# Altium PCB PCB.PcbDoc (part 2 of 2)
Units mm, origin at the board's own origin, x right, y up, seen from the top; angles counter-clockwise.
Board outline 144.27 x 96.27 mm, 4 copper layers (Top Layer, Layer 1, Layer 2, Bottom Layer), stack 0.603 mm thick; 103 components, 109 nets, 723 pads, 259 vias.
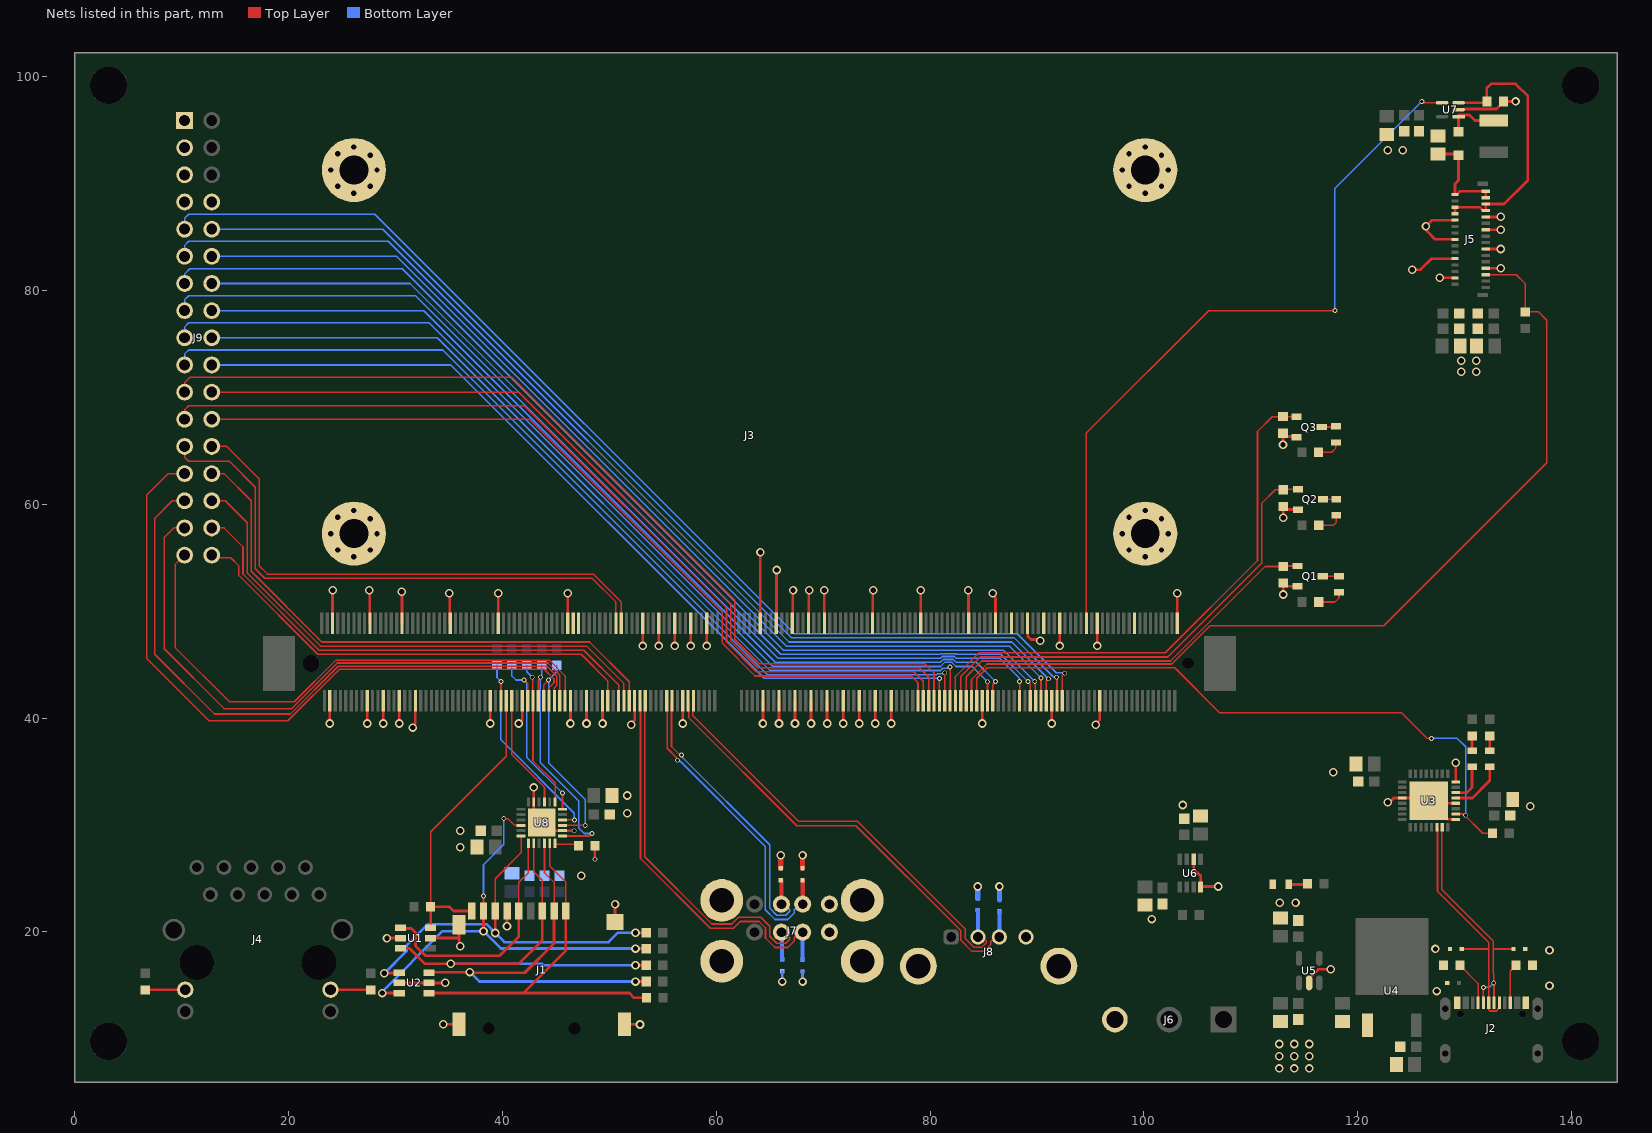
[diagram p4: the nets of this part, all layers, seen from the top]

## Via types
v1: diameter 0.8, hole 0.5, Top Layer to Bottom Layer, tented both sides, 169 vias
v2: diameter 0.45, hole 0.3, Top Layer to Bottom Layer, tented both sides, 58 vias
v3: diameter 0.8, hole 0.5, Top Layer to Bottom Layer, 32 vias

## Nets (pads, with @x,y where several pads share a name; then routed paths per layer and width w, separated by ;. In a path a pad name is that pad's centre, name@x,y a point inside that pad or via, vN(x,y) a via of type N, cw(c..) or ccw(c..) an arc to the next point about the centre after c; other vN are vias at no path point) (continued)
GND: C1.1 C2.1 C3.1 C4.1 C5.1 C6.1 C7.1 C8.1 C9.1 C10.1 C11.1 C12.1 C13.1 C14.1 C15.1 C16.1 C17.1 C18.1 C19.1 C20.1 C21.1 C22.1 C23.1 C24.1 C25.1 C26.1 C27.1 C28.1 C29.1 C30.1 C31.1 C32.1 C33.1 D1.2 D2.2 D3.2 D5.2 D6.2 D7.2 D8.2 D9.2 D10.2 J1.6 J1.10 J2.A1-B12 J2.A12-B1 J3.315 J3.P2 J3.P9 J3.P12 J3.P15 J3.P18 J3.P32 J3.P38 J3.P47 J3.P50 J3.P53 J3.P59 J3.P68 J3.P79 J3.P82 J3.P85 J3.P88 J3.P91 J3.P94 J3.P97 J3.P100 J3.P103 J3.P120 J3.P133 J3.P142 J3.S3 J3.S10 J3.S16 J3.S25 J3.S34 J3.S47 J3.S61 J3.S64 J3.S67 J3.S70 J3.S73 J3.S80 J3.S83 J3.S86 J3.S89 J3.S92 J3.S101 J3.S110 J3.S119 J3.S124 J3.S130 J3.S136 J3.S143 J3.S158 J5.9 J5.10 J5.13 J5.16 J5.19 J5.22 J5.25 J5.28 J6.3 J7.4A J7.4B J7.5 J8.4 J8.Shell J9.1 J9.3 J9.5 J9.7 J9.8 LED3.2 Q1.2 Q2.2 Q3.2 R7.1 R8.1 R10.1 R16.1 R25.1 R26.1 R27.1 U1.2 U1.5 U2.2 U2.5 U3.4 U3.17 U3.20 U3.24 U3.33 U4.1 U5.2 U6.2 U6.8 U7.2 U8.2 U8.11 U8.25 | length 203.6
  Top Layer w0.254: v1(23.869,39.497) J3.P2@23.869,41.619 ; J3.S3@24.119,48.869 24.125,48.875 24.125,51.938 v1(24.13,51.943) ; v1(27.369,39.497) J3.P9@27.369,41.619 ; v1(27.559,51.943) 27.594,51.908 27.594,48.895 J3.S10@27.619,48.869 ; v1(28.869,39.497) J3.P12@28.869,41.619 ; v1(29.21,19.431) U1.5@30.477,19.431 ; U2.2@30.35,15.24 U2.5@33.15,15.24 v1(34.671,15.24) ; v1(30.369,39.497) J3.P15@30.369,41.619 ; v1(30.607,51.816) 30.613,51.81 30.613,48.875 J3.S16@30.619,48.869 ; v1(31.623,39.116) 31.623,39.264 31.869,39.51 J3.P18@31.869,41.619 ; U1.2@33.277,19.431 35.811,19.431 35.938,19.304 ; v1(34.476,11.371) J1.10@35.938,11.371 ; v1(35.052,51.689) 35.094,51.647 35.094,48.895 J3.S25@35.119,48.869 ; J1.10@35.938,20.671 35.938,19.304 ; v1(36.068,18.669) 35.964,18.773 35.964,19.278 35.938,19.304 ; v1(38.869,39.497) J3.P32@38.869,41.619 ; J3.S34@39.619,48.869 39.622,48.872 39.622,51.687 v1(39.624,51.689) ; v1(40.438,20.522) J1.6@40.438,21.971 ; v1(41.529,39.497) 41.869,39.837 J3.P38@41.869,41.619 ; v1(42.938,33.516) U8.11@42.938,32.161 42.938,30.976 U8.25@43.688,30.226 44.438,29.476 U8.2@45.623,29.476 v2(46.724,29.476) ; v1(46.101,51.689) 46.11,51.68 46.11,48.878 J3.S47@46.119,48.869 ; v1(46.369,39.497) J3.P47@46.369,41.619 ; v1(47.869,39.497) J3.P50@47.869,41.619 ; v2(48.654,26.81) R10.1@48.654,28.067 ; v1(49.369,39.497) J3.P53@49.369,41.619 ; J1.10@50.538,20.921 v1(50.538,22.598) ; J1.10@51.438,11.371 v1@52.891,11.371 ; v1(52.07,39.37) 52.07,39.518 52.369,39.817 J3.P59@52.369,41.619 ; v1(53.119,46.747) J3.S61@53.119,48.869 ; v1(54.619,46.747) J3.S64@54.619,48.869 ; v1(56.119,46.747) J3.S67@56.119,48.869 ; v1(56.869,39.497) J3.P68@56.869,41.619 ; v1(57.619,46.747) J3.S70@57.619,48.869 ; v1(59.119,46.747) J3.S73@59.119,48.869 ; J3.S80@64.119,48.869 64.127,48.877 64.127,55.491 v1(64.135,55.499) ; v1(64.369,39.497) J3.P79@64.369,41.619 ; J3.S83@65.619,48.869 65.639,48.889 65.639,53.828 v1(65.659,53.848) ; v1(65.869,39.497) J3.P82@65.869,41.619 ; J3.S86@67.119,48.869 67.144,48.895 67.144,51.904 v1(67.183,51.943) ; v1(67.369,39.497) J3.P85@67.369,41.619 ; J3.S89@68.619,48.869 68.644,48.895 68.644,51.88 v1(68.707,51.943) ; v1(68.869,39.497) J3.P88@68.869,41.619 ; v1(70.104,51.943) 70.112,51.935 70.112,48.877 J3.S92@70.119,48.869 ; v1(70.369,39.497) J3.P91@70.369,41.619 ; v1(71.869,39.497) J3.P94@71.869,41.619 ; v1(73.369,39.497) J3.P97@73.369,41.619 ; J3.S101@74.619,48.869 74.644,48.895 74.644,51.911 v1(74.676,51.943) ; v1(74.869,39.497) J3.P100@74.869,41.619 ; v1(76.369,39.497) J3.P103@76.369,41.619 ; J3.S110@79.119,48.869 79.12,48.87 v1(79.121,51.943) v1(79.121,51.943) ; v1(83.566,51.943) 83.594,51.915 83.594,48.895 J3.S119@83.619,48.869 ; v1(84.869,39.497) J3.P120@84.869,41.619 ; v1(85.852,51.689) 85.852,51.541 86.119,51.274 J3.S124@86.119,48.869 ; J3.S130@89.119,48.869 89.144,48.844 89.144,47.635 89.431,47.348 90.193,47.348 v1(90.297,47.244) ; v1(91.369,39.497) J3.P133@91.369,41.619 ; v1(92.119,46.747) J3.S136@92.119,48.869 ; v1(95.504,39.37) 95.504,39.518 95.869,39.883 J3.P142@95.869,41.619 ; v1(95.619,46.747) J3.S143@95.619,48.869 ; J3.S158@103.119,48.869 103.121,48.872 103.121,51.686 v1(103.124,51.689) ; U6.2@104.648,26.797 104.648,25.908 105.298,25.258 U6.8@105.298,24.197 105.358,24.257 v1(106.934,24.257) ; v1(112.998,65.575) R27.1@112.998,66.637 ; v1(113.03,51.562) R25.1@113.03,52.624 ; v1(113.03,58.742) R26.1@113.03,59.804 ; R25.1@113.055,52.624 113.357,52.322 Q1.2@114.363,52.322 ; R27.1@113.325,66.335 Q3.2@114.331,66.335 ; R26.1@113.357,59.502 Q2.2@114.363,59.502 ; U5.2@115.443,15.24 115.443,15.64 116.313,16.51 v1(117.475,16.51) ; v1(122.809,32.131) 122.957,32.131 123.357,32.531 U3.4@124.148,32.531 126.398,32.531 U3.33@126.648,32.281 ; v1(125.095,81.915) 125.114,81.934 125.876,81.934 126.91,82.968 J5.22@129.078,82.968 ; v1(127.65,81.168) J5.28@129.078,81.168 ; J5.16@129.078,84.768 127.234,84.768 126.469,85.533 126.469,85.875 v1(126.365,85.979) 126.954,86.568 J5.10@129.078,86.568 ; U3.17@129.148,30.531 128.398,30.531 U3.33@126.648,32.281 ; U3.20@129.148,32.031 126.898,32.031 U3.33@126.648,32.281 ; U3.24@129.148,34.031 129.159,34.042 v1(129.159,35.814) ; U7.2@129.406,96.939 129.428,96.917 129.873,96.917 129.917,96.961 132.953,96.961 133.63,97.638 R16.1@133.63,97.663 v1(134.747,97.663) ; J5.25@131.953,82.068 v1(133.376,82.068) ; J5.19@131.953,83.868 v1(133.376,83.868) ; J5.13@131.953,85.668 v1(133.376,85.668) ; J5.9@131.953,86.868 v1(133.376,86.868)
  Top Layer w0.5: D5.2@66.04,25.95 v1(66.04,27.178) ; D6.2@68.072,25.95 v1(68.072,27.178)
  Bottom Layer w0.254: v1(66.167,15.367) D9.2@66.167,16.341 ; v1(68.072,15.367) D10.2@68.072,16.299
  Bottom Layer w0.5: D7.2@84.455,23.156 v1(84.455,24.257) ; D8.2@86.487,23.029 v1(86.487,24.257)
  other v1: 112.649,7.239 114.046,7.239 115.443,7.239 112.649,8.382 114.046,8.382 115.443,8.382 112.649,9.525 114.046,9.525 115.443,9.525 52.872,11.351 127.381,14.478 137.922,14.986 137.922,18.288 127.254,18.415 100.711,21.209 112.706,22.733 114.173,22.733 47.371,25.273 36.068,27.94 36.068,29.464 51.689,31.115 136.123,31.75 103.632,31.877 51.689,32.766 117.708,34.925 129.667,72.39 131.064,72.39 129.667,73.406 131.064,73.406 122.809,93.091 124.206,93.091
  other v3: 26.119,55.09 100.119,55.09 24.595,55.725 27.643,55.725 98.595,55.725 101.643,55.725 23.96,57.249 28.278,57.249 97.96,57.249 102.278,57.249 27.643,58.646 101.643,58.646 24.595,58.773 98.595,58.773 26.119,59.408 100.119,59.408 26.119,89.09 100.119,89.09 24.595,89.725 27.643,89.725 98.595,89.725 101.643,89.725 23.96,91.249 28.278,91.249 97.96,91.249 102.278,91.249 27.643,92.646 101.643,92.646 24.595,92.773 98.595,92.773 26.119,93.408 100.119,93.408
I2C_GP_SCL: J3.S48
I2C_GP_SDA: J3.S49
I2C_PM_SCL: J3.P121 J9.17 | length 92.3
  Top Layer w0.15: J3.P121@85.369,41.619 v2(85.369,43.409)
  Bottom Layer w0.15: J9.17@10.287,75.565 10.287,76.581 10.668,76.962 33.147,76.962 65.278,44.831 80.976,44.831 81.355,45.21 82.045,45.21 82.424,44.831 83.947,44.831 v2(85.369,43.409)
I2C_PM_SDA: J3.P122 J9.16 | length 89.8
  Top Layer w0.15: J3.P122@85.869,41.619 85.869,43.116 86.106,43.353 v2(86.106,43.434)
  Bottom Layer w0.15: J9.16@12.827,78.105 32.639,78.105 65.532,45.212 80.968,45.212 81.241,45.485 82.159,45.485 82.432,45.212 84.328,45.212 v2(86.106,43.434)
LCD_BKLT_A: C30.2 D4.2 J5.1 J5.2 J5.3 | length 9.4
  Top Layer w0.254: C30.2@127.508,92.749 129.29,92.749 D4.2@129.413,92.626 129.413,90.297 129.078,89.962 J5.2@129.078,88.968 129.253,88.968 129.553,89.268 J5.1@131.953,89.268 J5.3@131.953,88.668
LCD_BKLT_EN: J3.S127
LCD_BKLT_K: J5.5 J5.6 J5.7 J5.8 R16.2 U7.3 | length 25.1
  Top Layer w0.254: J5.8@129.078,87.168 J5.6@129.078,87.768 131.403,87.768 131.703,87.468 J5.7@131.953,87.468 J5.5@131.953,88.068 133.661,88.068 135.89,90.297 135.89,98.171 134.747,99.314 132.461,99.314 132.05,98.903 R16.2@132.05,97.693 ; U7.3@129.666,97.539 131.956,97.539 R16.2@132.08,97.663
LCD_BKLT_PWM: J3.S141 U7.4 | length 70.6
  Top Layer w0.15: J3.S141@94.619,48.869 94.619,66.679 106.045,78.105 v2(117.856,78.105) ; v2(125.984,97.663) 126.065,97.663 126.176,97.553 U7.4@127.873,97.553
  Bottom Layer w0.15: v2(117.856,78.105) 117.856,89.535 v2(125.984,97.663)
LCD_NRST: J3.P118 J5.27 R15.1 | length 86.6
  Top Layer w0.15: J3.P118@83.869,41.619 83.869,43.618 85.315,45.064 102.603,45.064 106.18,48.641 122.428,48.641 137.668,63.881 137.668,77.216 136.893,77.991 R15.1@135.636,77.991 135.636,80.645 134.813,81.468 J5.27@131.953,81.468
LCD_VDD_EN: J3.S133
NetD4_1: D4.1 L1.2 U7.1 | length 5.1
  Top Layer w0.254: D4.1@129.413,94.826 129.413,96.393 130.429,96.393 130.937,95.885 L1.2@132.715,95.885
NetJ2_A5: J2.A5 R8.2 | length 4.2
  Top Layer w0.15: R8.2@129.566,16.891 129.566,16.866 131.242,15.19 J2.A5@131.242,13.394
NetJ2_B5: J2.B5 R7.2 | length 3.7
  Top Layer w0.15: J2.B5@134.242,13.394 134.242,16.324 134.784,16.866 R7.2@134.784,16.891
NetJ4_11: J4.11 R13.1 | length 3.8
  Top Layer w0.254: R13.1@6.604,14.592 6.617,14.605 J4.11@10.35,14.605
NetJ4_13: J4.13 R12.1 | length 3.8
  Top Layer w0.254: J4.13@23.939,14.605 27.673,14.605 R12.1@27.686,14.592
NetLED1_1: LED1.1 R22.1 | length 2.6
  Top Layer w0.15: R22.1@116.345,50.859 117.856,50.859 118.237,51.24 LED1.1@118.237,51.76
NetLED1_2: LED1.2 Q1.3 | length 1.5
  Top Layer w0.15: Q1.3@116.713,53.272 116.725,53.26 LED1.2@118.237,53.26
NetLED2_1: LED2.1 R23.1 | length 2.4
  Top Layer w0.15: R23.1@116.345,58.039 117.729,58.039 117.983,58.293 LED2.1@117.983,58.952
NetLED2_2: LED2.2 Q2.3 | length 1.2
  Top Layer w0.15: Q2.3@116.745,60.452 LED2.2@117.983,60.452
NetLED3_1: LED3.1 R17.2 | length 1.8
  Top Layer w0.254: LED3.1@113.526,24.447 115.24,24.447 R17.2@115.303,24.511
NetLED4_1: LED4.1 R24.1 | length 2.3
  Top Layer w0.15: R24.1@116.313,64.872 117.57,64.872 117.951,65.253 LED4.1@117.951,65.773
NetLED4_2: LED4.2 Q3.3 | length 1.4
  Top Layer w0.15: Q3.3@116.618,67.219 117.897,67.219 LED4.2@117.951,67.273
NetLED5_1: LED5.1 R28.1 | length 1.4
  Top Layer w0.254: LED5.1@130.683,36.945 R28.1@130.683,38.341
NetLED5_2: LED5.2 U3.22 | length 3.7
  Top Layer w0.254: U3.22@129.148,33.031 130.186,33.031 130.683,33.528 LED5.2@130.683,35.445
NetLED6_1: LED6.1 R29.1 | length 1.4
  Top Layer w0.254: LED6.1@132.334,36.945 R29.1@132.334,38.341
NetLED6_2: LED6.2 U3.21 | length 5.1
  Top Layer w0.254: U3.21@129.148,32.531 130.702,32.531 132.334,34.163 LED6.2@132.334,35.445
NetR10_2: R10.2 U8.24 | length 2.2
  Top Layer w0.15: U8.24@44.938,28.291 44.938,28.254 44.998,28.194 R10.2@47.104,28.194
QSPI0_CLK: J3.P56 J9.32 | length 47.1
  Top Layer w0.15: J9.32@12.827,57.785 13.97,57.785 15.748,56.007 15.748,53.467 22.86,46.355 47.625,46.355 50.869,43.111 J3.P56@50.869,41.619
QSPI0_CS: J3.P54 J9.34 | length 44.3
  Top Layer w0.15: J9.34@12.827,55.245 13.074,54.998 14.598,54.998 15.367,54.229 15.367,53.34 22.733,45.974 47.371,45.974 49.869,43.476 J3.P54@49.869,41.619
QSPI0_IO0: J3.P58 J9.28 | length 52.8
  Top Layer w0.15: J9.28@12.827,62.865 13.97,62.865 16.51,60.325 16.51,53.721 23.114,47.117 48.149,47.117 51.869,43.397 J3.P58@51.869,41.619
QSPI0_IO1: J3.P57 J9.30 | length 50
  Top Layer w0.15: J9.30@12.827,60.325 14.097,60.325 16.15,58.272 16.15,53.573 22.987,46.736 47.879,46.736 51.369,43.246 J3.P57@51.369,41.619
QSPI0_IO2: J3.S56 J9.25 | length 53.4
  Top Layer w0.15: J9.25@10.287,65.405 10.287,64.389 10.668,64.008 14.478,64.008 16.891,61.595 16.891,53.975 17.78,53.086 48.387,53.086 50.619,50.854 J3.S56@50.619,48.869
QSPI0_IO3: J3.S57 J9.26 | length 51.1
  Top Layer w0.15: J9.26@12.827,65.405 14.224,65.405 17.272,62.357 17.272,54.229 18.034,53.467 48.514,53.467 51.119,50.862 J3.S57@51.119,48.869
SDCARD_CK: J1.5 U1.4 U8.19 | length 22.6
  Top Layer w0.15: J1.5@41.538,21.971 41.538,24.647 42.438,25.547 U8.19@42.438,28.291
  Top Layer w0.254: U1.4@30.538,20.32 31.496,20.32 31.877,19.939 31.877,18.7 32.797,17.78 39.751,17.78 41.538,19.567 J1.5@41.538,21.971
SDCARD_CMD: J1.3 R1.1 U1.6 U8.20 | length 42.5
  Top Layer w0.15: U8.20@42.938,28.291 42.938,25.642 43.738,24.842 J1.3@43.738,21.971
  Top Layer w0.254: U1.6@30.477,18.481 31.303,18.481 32.766,17.018 v1(35.179,17.018) 41.529,17.018 43.738,19.227 J1.3@43.738,21.971 ; v1(52.451,16.891) R1.1@53.454,16.891
  Bottom Layer w0.254: v1(35.179,17.018) 43.699,17.018 43.826,16.891 v1(52.451,16.891)
SDCARD_DAT0: J1.7 R2.1 U2.1 U8.18 | length 39.3
  Top Layer w0.15: J1.7@39.338,21.971 39.338,24.987 41.753,27.402 U8.18@41.753,28.976
  Top Layer w0.254: v1(28.956,16.129) 28.987,16.16 30.319,16.16 U2.1@30.35,16.19 ; v1(39.338,19.907) J1.7@39.338,21.971 ; v1(52.451,19.939) R2.1@53.454,19.939
  Bottom Layer w0.254: v1(28.956,16.129) 31.054,18.227 31.054,18.735 33.048,20.729 38.516,20.729 v1(39.338,19.907) 40.195,19.05 49.943,19.05 50.832,19.939 v1(52.451,19.939)
SDCARD_DAT1: J1.8 R3.1 U2.3 U8.16 | length 42.7
  Top Layer w0.15: J1.8@38.238,21.971 v2(38.238,23.379) ; v2(40.132,30.607) 40.513,30.607 41.144,29.976 U8.16@41.753,29.976
  Top Layer w0.254: v1(28.763,14.29) U2.3@30.35,14.29 ; v1(38.238,20.077) J1.8@38.238,21.971 ; v1(52.451,18.451) R3.1@53.454,18.451
  Bottom Layer w0.15: v2(38.238,23.379) 38.238,26.3 40.132,28.194 v2(40.132,30.607)
  Bottom Layer w0.254: v1@28.636,14.29 34.423,20.077 38.216,20.077 38.227,20.066 v1(38.238,20.077) 39.864,18.451 v1(52.451,18.451)
SDCARD_DAT2: J1.1 R4.1 U2.4 U8.23 | length 36.8
  Top Layer w0.15: U8.23@44.438,28.291 44.438,26.174 45.938,24.674 J1.1@45.938,21.971
  Top Layer w0.254: U2.4@33.15,14.29 41.976,14.29 ; J1.1@45.938,21.971 45.938,18.252 41.976,14.29 ; R4.1@53.467,13.843 52.324,13.843 51.877,14.29 41.976,14.29
SDCARD_DAT3: J1.2 R5.1 U2.6 U8.22 | length 39.5
  Top Layer w0.15: U8.22@43.938,28.291 43.938,25.531 44.838,24.631 J1.2@44.838,21.971
  Top Layer w0.254: U2.6@33.15,16.19 33.183,16.223 36.924,16.223 v1(36.957,16.256) 37.023,16.19 42.098,16.19 44.838,18.93 J1.2@44.838,21.971 ; v1(52.451,15.367) R5.1@53.454,15.367
  Bottom Layer w0.254: v1(36.957,16.256) 37.846,15.367 v1(52.451,15.367)
SER0_CTS: J3.P132 J9.11 | length 101
  Top Layer w0.15: J3.P132@90.869,41.619 90.869,43.498 v2(91.059,43.688)
  Bottom Layer w0.15: J9.11@10.287,83.185 10.287,84.201 10.668,84.582 29.337,84.582 66.802,47.117 87.63,47.117 v2(91.059,43.688)
SER0_RTS: J3.P131 J9.12 | length 96
  Top Layer w0.15: J3.P131@90.369,41.619 v2(90.369,43.76)
  Bottom Layer w0.15: J9.12@12.827,83.185 30.099,83.185 66.548,46.736 87.393,46.736 v2(90.369,43.76)
SER0_RX: J3.P130 J9.13 | length 98.4
  Top Layer w0.15: v2(89.789,43.434) 89.829,43.394 89.829,41.659 J3.P130@89.869,41.619
  Bottom Layer w0.15: J9.13@10.287,80.645 10.32,80.678 10.32,81.567 10.774,82.021 30.628,82.021 66.294,46.355 86.868,46.355 v2(89.789,43.434)
SER0_TX: J3.P129 J9.14 | length 93.7
  Top Layer w0.15: v2(89.154,43.434) 89.154,43.353 89.369,43.138 J3.P129@89.369,41.619
  Bottom Layer w0.15: J9.14@12.827,80.645 31.369,80.645 66.04,45.974 80.952,45.974 81.013,46.035 82.387,46.035 82.448,45.974 86.614,45.974 v2(89.154,43.434)
SER1_RX: J3.P135 J9.9 | length 103.9
  Top Layer w0.15: J3.P135@92.369,41.619 92.369,43.982 v2(92.583,44.196)
  Bottom Layer w0.15: J9.9@10.287,85.725 10.287,86.741 10.668,87.122 28.067,87.122 67.31,47.879 88.146,47.879 91.785,44.24 92.539,44.24 v2(92.583,44.196)
SER1_TX: J3.P134 J9.10 | length 98.6
  Top Layer w0.15: v2(91.821,43.815) 91.869,43.767 J3.P134@91.869,41.619
  Bottom Layer w0.15: J9.10@12.827,85.725 28.829,85.725 67.056,47.498 87.884,47.498 91.526,43.856 91.78,43.856 v2(91.821,43.815)
SMARC_GPIO0: J3.P108 J9.24 | length 79.6
  Top Layer w0.15: J9.24@12.827,67.945 42.545,67.945 60.579,49.911 60.579,46.99 63.627,43.942 78.232,43.942 78.869,43.305 J3.P108@78.869,41.619
SMARC_GPIO1: J3.P109 J9.23 | length 84.5
  Top Layer w0.15: J9.23@10.287,67.945 10.32,67.978 10.32,68.867 10.668,69.215 42.037,69.215 60.96,50.292 60.96,47.117 63.733,44.344 78.465,44.344 79.369,43.44 J3.P109@79.369,41.619
SMARC_GPIO2: J3.P110 J9.22 | length 82.3
  Top Layer w0.15: J9.22@12.827,70.485 41.529,70.485 61.341,50.673 61.341,47.244 63.881,44.704 78.994,44.704 79.869,43.829 J3.P110@79.869,41.619
SMARC_GPIO3: J3.P111 J9.21 | length 87.4
  Top Layer w0.15: J9.21@10.287,70.485 10.32,70.518 10.32,71.407 10.668,71.755 10.795,71.882 40.894,71.882 61.722,51.054 61.722,47.379 64.016,45.085 79.502,45.085 80.369,44.218 J3.P111@80.369,41.619
SMARC_GPIO4: J3.P112 J9.20 | length 82.3
  Top Layer w0.15: J3.P112@80.869,41.619 v2(80.869,43.718)
  Bottom Layer w0.15: J9.20@12.827,73.025 35.179,73.025 64.486,43.718 v2(80.869,43.718)
SMARC_GPIO5: J3.P113 J9.19 | length 87.5
  Top Layer w0.15: J3.P113@81.369,41.619 v2(81.369,44.234)
  Bottom Layer w0.15: J9.19@10.287,73.025 10.287,74.041 10.668,74.422 34.417,74.422 64.77,44.069 80.619,44.069 80.693,44.143 81.131,44.143 81.165,44.177 81.312,44.177 v2(81.369,44.234)
SMARC_GPIO6: J3.P114 J9.18 | length 85.2
  Top Layer w0.15: J3.P114@81.869,41.619 v2(81.869,44.785)
  Bottom Layer w0.15: J9.18@12.827,75.565 33.909,75.565 65.024,44.45 80.984,44.45 81.193,44.659 81.662,44.659 81.788,44.785 v2(81.869,44.785)
SMARC_GPIO7: J3.P115 Q3.1 R27.2 | length 51.3
  Top Layer w0.15: J3.P115@82.369,41.619 82.369,43.888 84.582,46.101 101.981,46.101 110.617,54.737 110.617,66.802 112.002,68.187 R27.2@112.998,68.187 114.25,68.187 Q3.1@114.268,68.169
SMARC_GPIO8: J3.P116 Q2.1 R26.2 | length 44.3
  Top Layer w0.15: J3.P116@82.869,41.619 82.869,43.888 84.701,45.72 102.235,45.72 110.998,54.483 110.998,60.071 112.281,61.354 R26.2@113.03,61.354 ; R26.2@113.078,61.402 Q2.1@114.395,61.402
SMARC_GPIO9: J3.P117 Q1.1 R25.2 | length 37.5
  Top Layer w0.15: J3.P117@83.369,41.619 83.369,43.872 84.836,45.339 102.489,45.339 111.324,54.174 R25.2@113.03,54.174 ; R25.2@113.078,54.222 Q1.1@114.363,54.222
SMARC_GPIO11: J3.P119 R9.2 U3.18 | length 61.9
  Top Layer w0.15: J3.P119@84.369,41.619 84.369,43.729 85.344,44.704 102.87,44.704 107.061,40.513 124.079,40.513 126.492,38.1 v2(126.873,38.1) ; U3.18@129.148,31.031 129.878,31.031 131.676,29.233 R9.2@132.604,29.233
  Bottom Layer w0.15: v2(126.873,38.1) 129.298,38.1 130.08,37.318 v2(130.08,30.921)
SMARC_NRST: J3.P127 J9.15 | length 96.3
  Top Layer w0.15: J3.P127@88.369,41.619 v2(88.369,43.411)
  Bottom Layer w0.15: J9.15@10.287,78.105 10.287,79.121 10.668,79.502 31.877,79.502 65.786,45.593 80.96,45.593 81.127,45.76 82.273,45.76 82.44,45.593 86.487,45.593 88.351,43.729 88.351,43.429 v2(88.369,43.411)
SMARC_SDIO_CD#: J1.9 J3.P35 R6.1 U1.3 | length 28.2
  Top Layer w0.15: R6.1@33.3,22.352 33.3,29.363 40.369,36.432 J3.P35@40.369,41.619
  Top Layer w0.254: U1.3@33.277,20.381 33.3,20.404 R6.1@33.3,22.352 35.052,22.352 35.433,21.971 J1.9@37.138,21.971
SMARC_SDIO_CK: J3.P36 U8.9 | length 10.7
  Top Layer w0.15: J3.P36@40.869,41.619 40.869,36.601 43.938,33.532 U8.9@43.938,32.161
SMARC_SDIO_CMD: J3.P34 R21.1 U8.4 | length 20.4
  Top Layer w0.15: J3.P34@39.869,41.619 v2(39.869,43.425) ; U8.4@45.623,30.476 45.627,30.48 v2(46.736,30.48)
  Bottom Layer w0.15: R21.1@39.497,44.945 39.497,43.797 v2(39.869,43.425) 39.869,37.982 46.736,31.115 v2(46.736,30.48)
SMARC_SDIO_D0: J3.P39 R20.1 U8.6 | length 18
  Top Layer w0.15: v2(42.037,43.561) 42.369,43.229 J3.P39@42.369,41.619 ; U8.6@45.623,31.476 v2(45.623,32.99)
  Bottom Layer w0.15: R20.1@40.894,44.945 40.894,43.942 41.275,43.561 v2(42.037,43.561) 42.291,43.307 42.291,36.322 v2(45.623,32.99)
SMARC_SDIO_D1: J3.P40 R19.1 U8.7 | length 13.9
  Top Layer w0.15: v2(42.799,43.815) 42.834,43.78 42.834,41.654 J3.P40@42.869,41.619 42.869,35.998 44.938,33.929 U8.7@44.938,32.161
  Bottom Layer w0.15: R19.1@42.291,44.945 42.291,44.323 v2(42.799,43.815)
SMARC_SDIO_D2: J3.P41 R18.1 U8.1 | length 23.3
  Top Layer w0.15: J3.P41@43.369,41.619 43.369,43.542 43.561,43.734 v2(43.561,43.815) ; U8.1@45.623,28.976 48.153,28.976 v2(48.387,29.21)
  Bottom Layer w0.15: R18.1@43.688,44.945 43.688,44.023 43.561,43.896 v2(43.561,43.815) 43.561,35.814 47.161,32.214 47.161,29.708 47.659,29.21 v2(48.387,29.21)
SMARC_SDIO_D3: J3.P42 R11.1 U8.3 | length 21
  Top Layer w0.15: J3.P42@43.869,41.619 43.869,43.107 v2(44.323,43.561) ; U8.3@45.623,29.976 45.625,29.974 47.75,29.974 v2(47.752,29.972)
  Bottom Layer w0.15: R11.1@45.085,44.945 45.085,44.323 v2(44.323,43.561) 44.323,35.814 47.752,32.385 v2(47.752,29.972)
SPI0_CLK: J3.P44 J9.29 | length 60.7
  Top Layer w0.15: J9.29@10.287,60.325 9.144,60.325 7.493,58.674 7.493,45.974 13.081,40.386 20.185,40.386 24.651,44.852 44.022,44.852 44.043,44.831 44.196,44.831 45.106,43.921 45.106,43.074 44.869,42.837 J3.P44@44.869,41.619
SPI0_CS: J3.P43 J9.27 | length 64.8
  Top Layer w0.15: J9.27@10.287,62.865 8.763,62.865 6.731,60.833 6.731,45.593 12.573,39.751 19.939,39.751 24.765,44.577 43.908,44.577 44.831,43.654 44.831,43.307 44.369,42.845 J3.P43@44.369,41.619
SPI0_MISO: J3.P45 J9.31 | length 56.6
  Top Layer w0.15: J9.31@10.287,57.785 9.271,57.785 8.382,56.896 8.382,46.482 13.97,40.894 20.304,40.894 24.56,45.15 44.266,45.15 45.381,44.035 45.381,42.96 45.369,42.948 J3.P45@45.369,41.619
SPI0_MOSI: J3.P46 J9.33 | length 52.1
  Top Layer w0.15: J9.33@10.287,55.245 9.398,54.356 9.398,46.609 14.478,41.529 20.55,41.529 24.446,45.425 44.38,45.425 45.869,43.936 J3.P46@45.869,41.619
USB0_D_N: D9.1 J3.P61 J7.2B | length 36.5
  Top Layer w0.15: J3.P61@53.369,41.619 53.321,41.571 53.321,27.04 59.609,20.752 61.44,20.752 62.074,21.386 64.172,21.386 65.012,20.545 65.012,19.61 65.665,18.957 66.515,18.957 66.888,19.33 66.888,19.455 66.361,19.982 J7.2B@66.09,19.982
  Bottom Layer w0.381: J7.2B@66.09,19.982 66.157,19.915 66.157,17.45 D9.1@66.167,17.441
USB0_D_P: D10.1 J3.P60 J7.3B | length 37.8
  Top Layer w0.15: J3.P60@52.869,41.619 52.917,41.571 52.917,26.872 59.441,20.348 61.608,20.348 62.242,20.982 64.004,20.982 64.608,20.378 64.608,19.443 65.498,18.553 66.682,18.553 67.292,19.163 67.292,19.455 67.819,19.982 J7.3B@68.09,19.982
  Bottom Layer w0.381: D10.1@68.072,17.399 68.081,17.408 68.081,19.973 J7.3B@68.09,19.982
USB1_D_N: D5.1 J3.P66 J7.2A | length 29
  Top Layer w0.15: J3.P66@55.869,41.619 55.821,41.571 55.821,37.344 56.511,36.654 56.567,36.654 56.667,36.555 v2(56.748,36.555)
  Top Layer w0.381: D5.1@66.04,24.85 66.09,24.8 J7.2A@66.09,22.602
  Bottom Layer w0.15: v2(56.748,36.555) 56.748,36.474 56.847,36.374 56.847,36.318 64.994,28.171 64.994,22.248 65.665,21.577 66.515,21.577 66.888,21.95 66.888,22.075 66.361,22.602 J7.2A@66.09,22.602
USB1_D_P: D6.1 J3.P65 J7.3A | length 30.3
  Top Layer w0.15: J3.P65@55.369,41.619 55.417,41.571 55.417,37.177 56.289,36.305 56.289,36.248 56.388,36.149 v2(56.388,36.068)
  Top Layer w0.381: J7.3A@68.09,22.602 D6.1@68.09,24.85
  Bottom Layer w0.15: v2(56.388,36.068) 56.469,36.068 56.568,35.969 56.625,35.969 64.59,28.004 64.59,22.081 65.498,21.173 66.682,21.173 67.292,21.783 67.292,22.075 67.819,22.602 J7.3A@68.09,22.602
USB2_D_N: D7.1 J3.P70 J8.2 | length 42.1
  Top Layer w0.15: J3.P70@57.869,41.619 57.821,41.571 57.821,40.229 67.703,30.346 73.215,30.346 83.285,20.276 83.285,19.388 84.084,18.589 84.858,18.589 85.269,19 85.269,19.124 85.181,19.212 85.127,19.212 84.815,19.524 J8.2@84.471,19.524
  Bottom Layer w0.381: D7.1@84.455,22.056 84.471,22.04 J8.2@84.471,19.524
USB2_D_P: D8.1 J3.P69 J8.3 | length 43.4
  Top Layer w0.15: J3.P69@57.369,41.619 57.417,41.571 57.417,40.062 67.536,29.942 73.048,29.942 82.881,20.109 82.881,19.22 83.916,18.185 85.026,18.185 85.673,18.832 85.673,19.124 85.761,19.212 85.815,19.212 86.127,19.524 J8.3@86.471,19.524
  Bottom Layer w0.381: J8.3@86.471,19.524 86.471,21.913 D8.1@86.487,21.929
USB_DEBUG_D_N: D1.1 J2.A7 J2.B7 U3.15 | length 22.9
  Top Layer w0.15: U3.15@127.898,29.781 127.85,29.733 127.85,23.975 132.646,19.179 132.646,18.415 ; J2.B7@131.742,13.394 v2(131.742,14.816) ; v2(132.715,15.24) 132.715,16.11 132.646,16.179 132.646,18.415 ; v2@132.729,15.226 132.729,13.408 J2.A7@132.742,13.394 ; D1.1@134.559,18.415 132.646,18.415
  Bottom Layer w0.15: v2(131.742,14.816) 132.291,14.816 v2(132.715,15.24)
USB_DEBUG_D_P: D2.1 J2.A6 J2.B6 U3.14 | length 23.3
  Top Layer w0.15: U3.14@127.398,29.781 127.446,29.733 127.446,23.807 132.242,19.012 132.242,18.415 ; D2.1@129.709,18.415 132.242,18.415 ; J2.B6@133.242,13.394 133.242,12.969 133.092,12.819 133.092,12.736 132.969,12.613 132.33,12.613 132.242,12.701 J2.A6@132.242,13.394 132.242,18.415
VIN_PWR_BAD#: J3.S150
pads on no net: J1. J2. J2.1 J2.A8 J2.B8 J3.MH1 J3.MH2 J3.MH3 J3.MH4 J3.P1 J3.P3 J3.P4 J3.P5 J3.P6 J3.P7 J3.P8 J3.P10 J3.P11 J3.P13 J3.P14 J3.P16 J3.P17 J3.P21 J3.P28 J3.P31 J3.P33 J3.P37 J3.P48 J3.P49 J3.P51 J3.P52 J3.P55 J3.P62 J3.P63 J3.P64 J3.P67 J3.P71 J3.P72 J3.P73 J3.P74 J3.P75 J3.P76 J3.P77 J3.P78 J3.P80 J3.P81 J3.P83 J3.P84 J3.P86 J3.P87 J3.P89 J3.P90 J3.P92 J3.P93 J3.P95 J3.P96 J3.P98 J3.P99 J3.P101 J3.P102 J3.P104 J3.P105 J3.P106 J3.P107 J3.P123 J3.P124 J3.P125 J3.P126 J3.P128 J3.P138 J3.P139 J3.P140 J3.P141 J3.P145 J3.P146 J3.S1 J3.S2 J3.S4 J3.S5 J3.S6 J3.S7 J3.S8 J3.S9 J3.S11 J3.S12 J3.S13 J3.S14 J3.S15 J3.S17 J3.S18 J3.S19 J3.S20 J3.S21 J3.S22 J3.S23 J3.S24 J3.S26 J3.S27 J3.S28 J3.S29 J3.S30 J3.S31 J3.S32 J3.S33 J3.S35 J3.S36 J3.S37 J3.S38 J3.S39 J3.S40 J3.S41 J3.S42 J3.S43 J3.S44 J3.S45 J3.S46 J3.S50 J3.S51 J3.S52 J3.S53 J3.S54 J3.S55 J3.S58 J3.S59 J3.S60 J3.S62 J3.S63 J3.S65 J3.S66 J3.S68 J3.S69 J3.S71 J3.S72 J3.S74 J3.S75 J3.S76 J3.S77 J3.S78 J3.S79 J3.S81 J3.S82 J3.S84 J3.S85 J3.S87 J3.S88 J3.S90 J3.S91 J3.S93 J3.S94 J3.S95 J3.S96 J3.S97 J3.S98 J3.S99 J3.S100 J3.S102 J3.S103 J3.S104 J3.S105 J3.S106 J3.S107 J3.S108 J3.S109 J3.S111 J3.S112 J3.S113 J3.S114 J3.S115 J3.S116 J3.S117 J3.S118 J3.S120 J3.S121 J3.S122 J3.S123 J3.S139 J3.S140 J3.S142 J3.S145 J3.S146 J3.S148 J3.S149 J3.S151 J3.S152 J3.S153 J3.S155 J3.S156 J3.S157 J4.5 J4.6 J4.15 J4.16 J4.17 J4.18 J5.4 J5.26 J5.S1 J5.S2 J7.1A J7.1B J8.1 MH1.8 MH2.8 MH3.8 MH4.8 U1.1 U3.3 U3.5 U3.6 U3.7 U3.8 U3.9 U3.10 U3.11 U3.12 U3.13 U3.23 U3.25 U3.26 U3.27 U3.28 U3.29 U3.31 U3.32 U5.4 U8.8 U8.10 U8.12 U8.13 U8.14 U8.15

## Polygon pours and split planes (outlines as drawn)
1V8 on Bottom Layer "NONET_L01_P-001" (solid, pour order 51): 38.97,45.736 38.985,45.72 45.974,45.72 45.974,52.07 38.989,52.07 38.989,45.72
GND on Bottom Layer "NONET_L01_P-001" (solid, pour order 0): 48.514,24.511 39.751,24.511 39.751,26.162 48.514,26.162
3V3 on Top Layer "Top Layer-3V3" (solid, pour order 64): 126.746,95.639 126.754,95.631 128.524,95.631 128.524,97.155 128.46,97.218 126.746,97.218 126.746,98.933 121.666,98.933 121.666,95.504 126.746,95.504
3V3 on Top Layer "Top Layer-3V3 1" (solid, pour order 61): 129.921,79.764 129.929,79.756 132.461,79.756 132.461,80.518 131.318,80.518 130.937,80.899 128.165,80.899 126.387,79.121 126.111,79.121 126.111,71.882 128.651,71.882 128.651,78.852 128.651,79.002 129.413,79.764
5V on Top Layer "NONET_L01_P-001" (solid, pour order 52): 98.171,42.926 103.124,42.926 103.124,37.211 98.171,37.211
3V3 on Top Layer "NONET_L01_P-001" (solid, pour order 56): 116.078,23.241 116.078,25.527 120.142,25.527 120.142,25.4 120.142,23.241
GND on Top Layer "NONET_L01_P-001" (solid, pour order 55): 111.379,23.368 111.379,25.527 112.776,25.527 112.776,23.368
GND on Top Layer "NONET_L01_P-001" (solid, pour order 11): 111.379,20.32 111.379,23.368 115.189,23.368 115.189,23.241 115.189,20.32
GND on Top Layer "NONET_L01_P-001" (solid, pour order 34): 121.666,95.504 121.771,95.504 128.397,95.504 128.397,93.599 125.984,93.599 125.984,92.329 121.666,92.329
1V8 on Top Layer "NONET_L01_P-001" (solid, pour order 30): 134.366,77.089 136.525,77.089 136.525,75.565 134.366,75.565
1V8 on Top Layer "NONET_L01_P-001" (solid, pour order 29): 131.318,80.518 131.318,81.153 134.493,81.153 134.493,78.867 132.715,78.867 132.715,80.518
1V8 on Top Layer "NONET_L01_P-001" (solid, pour order 25): 134.504,78.862 134.493,78.852 134.493,71.882 131.953,71.882 131.953,78.867 134.493,78.867
GND on Top Layer "NONET_L01_P-001" (solid, pour order 23): 128.651,78.867 131.953,78.867 131.953,71.882 128.651,71.882
GND on Top Layer "NONET_L01_P-001" (solid, pour order 22): 133.604,33.274 137.287,33.274 137.287,30.226 133.604,30.226
3V3 on Top Layer "NONET_L01_P-001" (solid, pour order 21): 133.604,33.274 133.604,30.226 131.826,30.226 130.81,31.242 128.651,31.242 128.651,31.877 130.81,31.877 132.207,33.274
1V8 on Top Layer "NONET_L01_P-001" (solid, pour order 20): 129.667,39.116 133.477,39.116 133.477,42.037 129.667,42.037 129.667,39.243
1V8 on Top Layer "NONET_L01_P-001" (solid, pour order 19): 120.65,33.147 122.174,33.147 122.809,33.782 124.587,33.782 124.587,36.576 120.65,36.576
GND on Top Layer "NONET_L01_P-001" (solid, pour order 18): 120.65,36.576 120.65,33.147 116.713,33.147 116.713,36.576
GND on Top Layer "NONET_L01_P-001" (solid, pour order 17): 135.267,12.758 135.267,19.165 135.255,19.177 138.557,19.177 138.557,14.097 136.144,14.097 136.144,12.758
GND on Top Layer "NONET_L01_P-001" (solid, pour order 16): 128.778,12.827 129.648,12.827 129.667,12.808 129.667,14.732 128.905,14.732 128.905,19.05 126.873,19.05 126.873,13.97 128.778,13.97
5V on Top Layer "NONET_L01_P-001" (solid, pour order 15): 129.032,15.748 129.032,14.732 129.667,14.732 129.667,14.224 130.556,14.224 130.556,15.748
5V on Top Layer "NONET_L01_P-001" (solid, pour order 14): 124.714,12.573 126.746,12.573 126.746,11.176 126.873,11.049 129.667,11.049 129.667,14.224 130.556,14.224 130.556,11.049 134.493,11.049 134.493,14.097 135.382,14.097 135.382,6.477 124.714,6.477
3V3 on Top Layer "NONET_L01_P-001" (solid, pour order 13): 111.436,12.624 111.488,12.573 120.142,12.573 120.142,23.241 116.078,23.241 116.078,14.351 114.935,14.351 114.935,16.129 111.379,16.129 111.379,12.573
GND on Top Layer "NONET_L01_P-001" (solid, pour order 12): 124.714,12.573 124.714,6.477 111.379,6.477 111.379,12.573
1V8 on Top Layer "NONET_L01_P-001" (solid, pour order 10): 115.189,16.637 115.189,20.32 111.379,20.32 111.379,16.637
5V on Top Layer "NONET_L01_P-001" (solid, pour order 9): 102.489,29.972 106.172,29.972 106.172,27.813 104.521,27.813 104.267,27.559 104.267,26.162 103.632,26.162 103.632,27.559 102.489,28.702
GND on Top Layer "NONET_L01_P-001" (solid, pour order 8): 106.172,29.972 102.489,29.972 102.489,32.512 106.172,32.512
1V8 on Top Layer "NONET_L01_P-001" (solid, pour order 7): 99.06,23.368 103.632,23.368 103.632,26.162 99.06,26.162
GND on Top Layer "NONET_L01_P-001" (solid, pour order 6): 99.06,23.368 102.489,23.368 102.489,20.574 99.06,20.574
3V3 on Top Layer "NONET_L01_P-001" (solid, pour order 5): 54.229,20.701 54.229,12.954 57.277,12.954 57.277,20.701
1V8 on Top Layer "NONET_L01_P-001" (solid, pour order 4): 49.403,35.052 46.736,35.052 46.736,31.369 45.085,31.369 45.085,30.734 46.228,30.734 46.355,30.861 47.498,30.861 48.133,30.226 49.403,30.226
GND on Top Layer "NONET_L01_P-001" (solid, pour order 3): 49.403,33.528 49.403,30.226 52.451,30.226 52.451,33.528
3V3 on Top Layer "NONET_L01_P-001" (solid, pour order 2): 38.608,26.162 38.608,30.226 40.259,30.226 40.767,29.718 42.291,29.718 42.291,29.21 41.148,29.21 40.64,28.702 40.64,26.162
GND on Top Layer "NONET_L01_P-001" (solid, pour order 1): 38.608,30.226 38.608,26.162 35.179,26.162 35.179,30.226 38.481,30.226
1V8 on Layer 2 "NONET_L01_P-001" (solid, pour order 41): 112.395,47.117 112.395,76.327 128.016,76.327 128.016,69.469 134.62,69.469 134.62,90.551 106.172,90.551 106.172,90.424 106.172,90.043 106.172,47.117
5V on Layer 2 "Layer 2-5V" (solid, pour order 65): 144.272,5.969 144.272,15.748 104.394,15.748 99.568,20.574 99.568,26.416 106.426,26.416 106.426,29.972 99.568,29.972 99.568,30.226 102.743,30.226 102.743,42.799 95.377,42.799 95.377,11.43 8.636,11.43 8.636,94.615 15.24,94.615 15.24,102.235 0,102.235 0,5.969 95.377,5.969
3V3 on Layer 2 "NONET_L01_P-001" (solid, pour order 47): 37.719,50.419 37.719,45.339 46.609,45.339 46.609,24.892 29.845,24.892 29.845,21.209 95.242,21.209 95.25,21.201 95.25,11.684 9.144,11.684 9.144,50.419
1V8 on Layer 2 "NONET_L01_P-001" (solid, pour order 50): 12.065,92.456 21.717,92.456 21.717,90.678 21.78,90.614 106.108,90.614 106.108,50.609 106.299,50.419 14.859,50.419 14.859,87.122 12.065,87.122
3V3 on Layer 2 "NONET_L01_P-001" (solid, pour order 49): 9.144,50.419 9.144,94.361 15.621,94.361 15.621,102.235 120.904,102.235 121.031,102.108 121.031,90.551 106.172,90.551 106.045,90.678 21.717,90.678 21.717,92.456 12.065,92.456 12.065,87.122 14.859,87.122 14.859,50.419
1V8 on Layer 2 "NONET_L01_P-001" (solid, pour order 43): 29.845,24.892 46.609,24.892 46.609,50.419 106.299,50.419 106.299,42.799 95.377,42.799 95.377,21.082 95.25,21.209 29.845,21.209 95.25,21.209 29.845,21.209
1V8 on Layer 2 "NONET_L01_P-001" (solid, pour order 58): 104.394,15.748 116.205,15.748 116.205,25.908 134.747,25.908 134.747,30.48 130.81,30.48 130.81,33.274 134.62,33.274 134.62,47.625 106.299,47.625 106.299,42.799 102.743,42.799 102.743,30.226 102.87,30.099 106.68,30.099 106.68,26.162 99.695,26.162 99.695,20.447
3V3 on Layer 2 "NONET_L01_P-001" (solid, pour order 57): 135.001,33.274 130.81,33.274 130.81,30.48 135.001,30.48
1V8 on Layer 2 "NONET_L01_P-001" (solid, pour order 44): 46.609,45.339 37.719,45.339 37.719,50.419 48.133,50.419 48.26,50.546 48.387,50.419 48.387,47.371 46.609,47.371
3V3 on Layer 2 "NONET_L01_P-001" (solid, pour order 36): 116.205,16.129 144.272,16.129 144.272,34.417 134.747,34.417 134.747,25.908 116.205,25.908
3V3 on Layer 2 "NONET_L01_P-001" (solid, pour order 40): 112.395,69.469 112.395,76.327 128.016,76.327 128.016,69.469
3V3 on Layer 2 "NONET_L01_P-001" (solid, pour order 38): 112.395,47.625 112.395,69.469 134.62,69.469 134.62,47.625 134.493,47.625
3V3 on Layer 2 "NONET_L01_P-001" (solid, pour order 37): 144.272,34.417 144.272,102.235 121.031,102.235 121.031,90.551 134.62,90.551 134.62,34.417
GND on Layer 1 "NONET_L01_P-001" (solid, pour order 31): 0,5.969 0,102.235 144.272,102.235 144.272,5.969

## Silkscreen, mask and mechanical layers (free items; w line width, h text height)
Top Overlay:
  drawing of 22 lines, arcs and shapes, not listed
  text "DISPLAY" at 109.982,82.742 h5
  text "PANIC" at 124.46,64.835 h5
  text "BOOT" at 124.541,58.146 h5
  text "STATUS" at 123.444,50.992 h5
  text "REV A" at 8.509,46.101 h3
  text "DESIGNED AND BUILT BY" at 6.477,36.488 h3
  text "RHETT HUMPHREYS" at 8.382,33.821 h3
  text "APEX" at 74.538,30.607 h12
  text "POWERED BY" at 81.153,28.601 h2
  text "GND" at 96.393,18.542 h0.8
  text "CANL" at 101.346,18.542 h0.8
  text "CANH" at 106.299,18.415 h0.8